# Altium PCB PCB_ModuLoop_V1.PcbDoc
Units mm, origin at the board's own origin, x right, y up, seen from the top; angles counter-clockwise.
Board outline 53.25 x 75 mm, 2 copper layers (Top Layer, Bottom Layer); 33 components, 28 nets, 92 pads, 45 vias.
Unrouted connection lines stored in the file: 1.
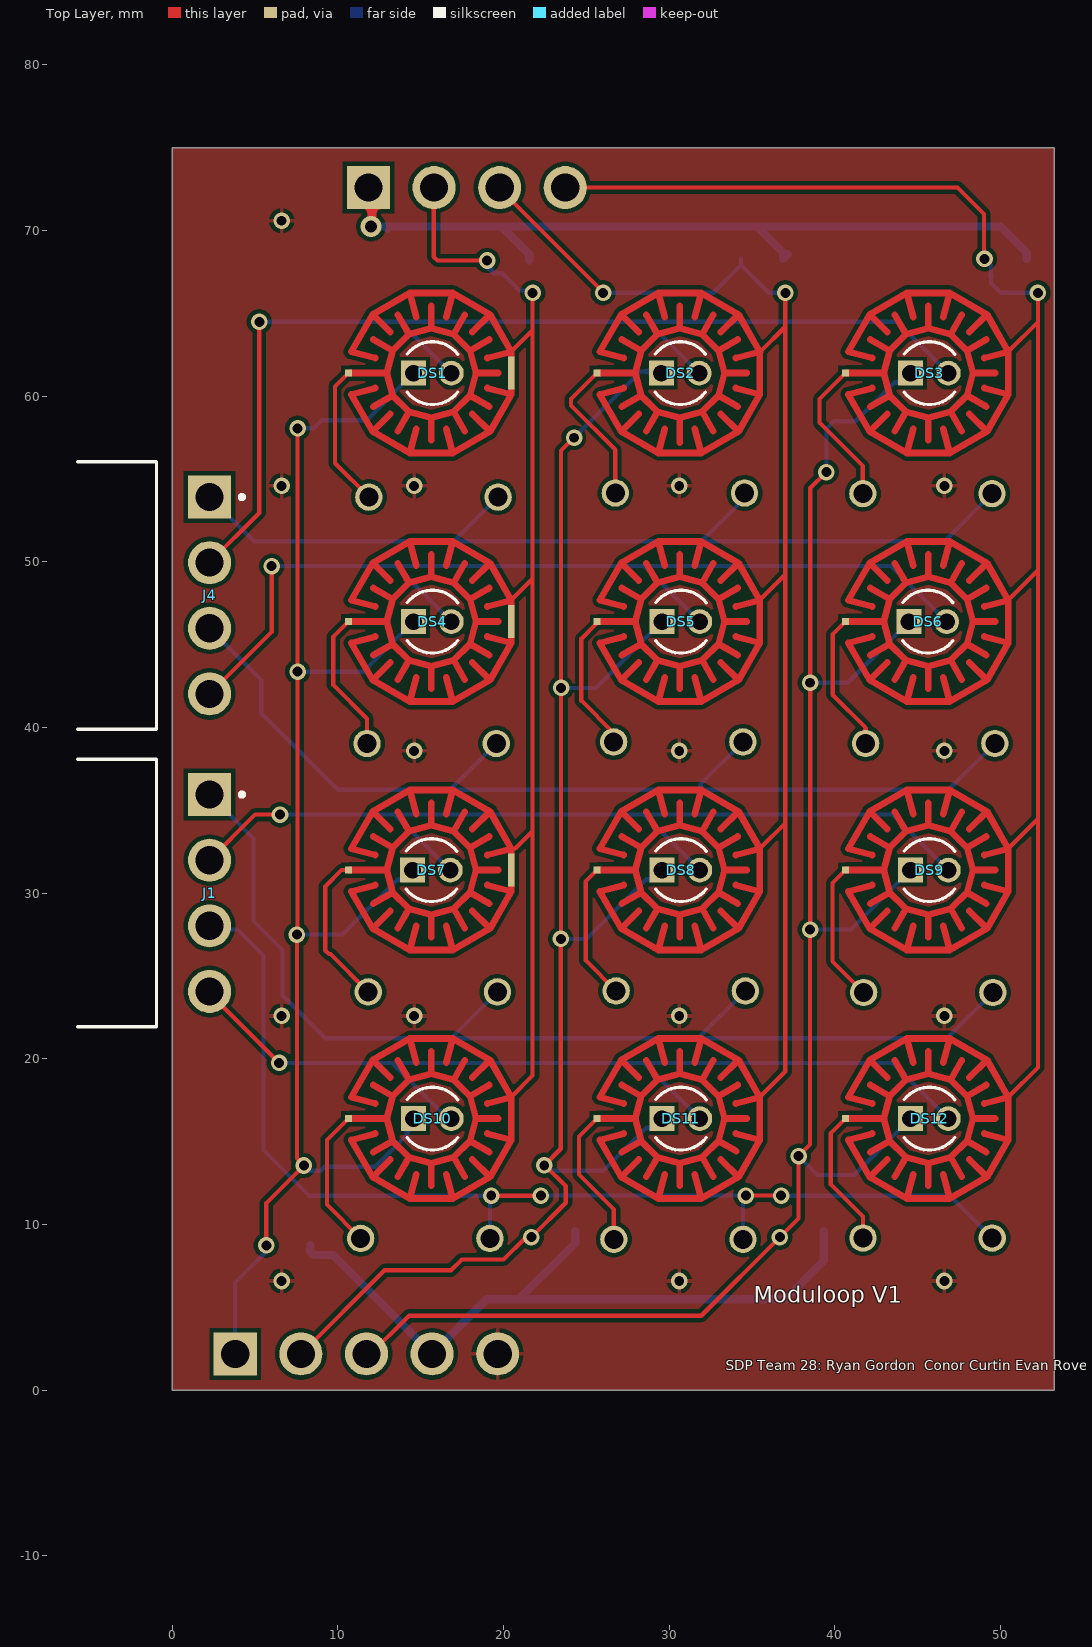
[diagram p0: Top Layer view]
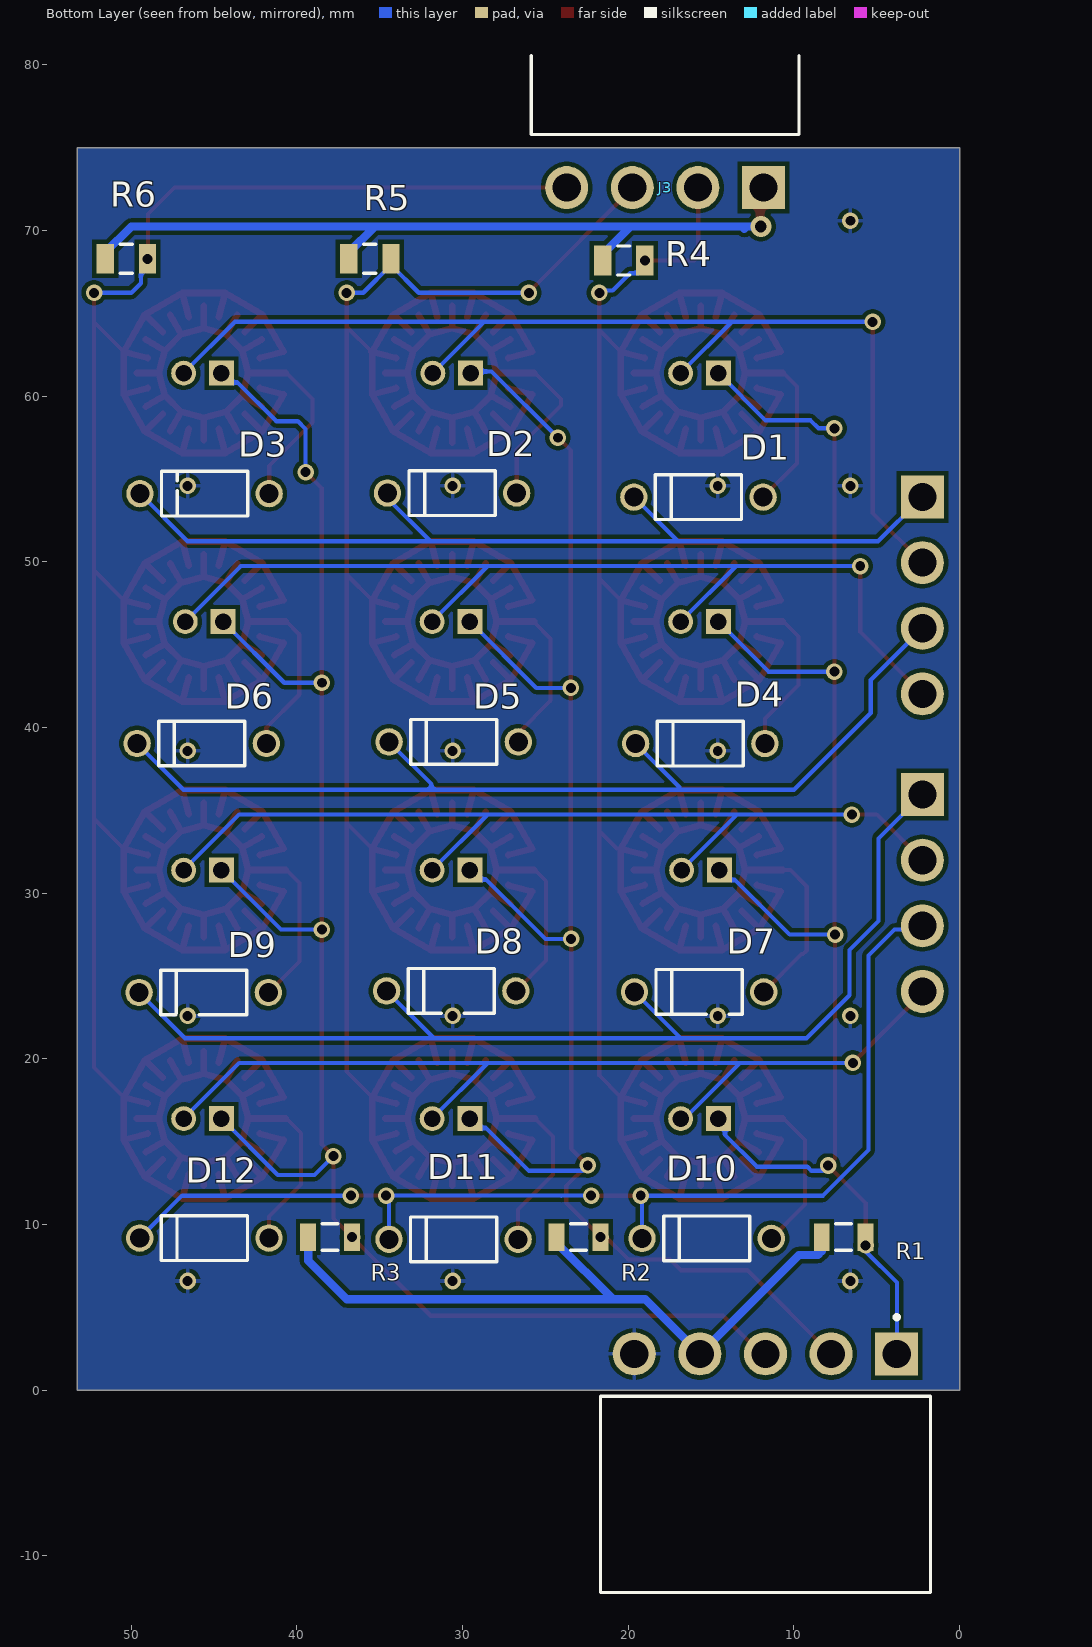
[diagram p1: Bottom Layer view, seen from below]

## Layer stack, top to bottom
Top Solder: solder mask 0.0102, Solder Resist, Dk 3.5
Top Layer: signal copper 0.0356
Dielectric 1: dielectric 0.32, FR-4, Dk 4.8
Bottom Layer: signal copper 0.0356
Bottom Solder: solder mask 0.0102, Solder Resist, Dk 3.5

## Board outline
0,0 53.25,0 53.25,75 0,75

## Design rules (kind name [scope] priority, off if disabled: settings)
Clearance [All] p1: gap=0.25 ignorepadtopadclearanceinfootprint=FALSE
ComponentClearance [All] p1 off: gap=0.254 collisioncheckmode=3 verticalgap=0.254 showdistances=FALSE
PolygonConnect [All] p1: connectstyle=Relief reliefconductorwidth=0.254 reliefentries=4 polygonreliefangle="90 Angle" airgapwidth=0.254
RoutingVias [All] p1: holewidth=0.6 width=1 viastyle="Through Hole" minholewidth=0.6 minwidth=1 maxholewidth=0.6 maxwidth=1
SolderMaskExpansion [All] p1: expansion=0.102 istentingtop=FALSE
Width Width_Power [(InNet('+3.3V') Or InNet('GND'))] p1: maxlimit=0.5 minlimit=0.25 preferedwidth=0.5
Width [All] p2 off: maxlimit=0.25 minlimit=0.2 preferedwidth=0.25
29 further rules are at their usual default settings.

## Classes and differential pairs
component class PCB: D1 D2 D8 D10 D11 D12 DS1 DS3 DS8 DS11 DS12 J1 J3 R3 R4 R6

## Components (designator, comment, footprint, x,y, rotation, side; value= is the part's Value field where it differs from the comment)
D1 "1N4004" FAIR-DO-41-2 15.765,53.915 r0 bottom
D2 "1N4004" FAIR-DO-41-2 30.64,54.16 r0 bottom
D3 "1N4004" FAIR-DO-41-2 45.58,54.125 r0 bottom
D4 "1N4004" FAIR-DO-41-2 15.655,39.04 r0 bottom
D5 "1N4004" FAIR-DO-41-2 30.54,39.14 r0 bottom
D6 "1N4004" FAIR-DO-41-2 45.75,39.045 r0 bottom
D7 "1N4004" FAIR-DO-41-2 15.725,24.05 r0 bottom
D8 "1N4004" FAIR-DO-41-2 30.69,24.11 r0 bottom
D9 "1N4004" FAIR-DO-41-2 45.63,24.015 r0 bottom
D10 "1N4004" FAIR-DO-41-2 15.27,9.17 r0 bottom
D11 "1N4004" FAIR-DO-41-2 30.55,9.115 r0 bottom
D12 "1N4004" FAIR-DO-41-2 45.59,9.19 r0 bottom
DS1 "304090041" LED-2P-2.28-3MM_A 15.7,61.4 r0 top
DS2 "304090041" LED-2P-2.28-3MM_A 30.66,61.4 r0 top
DS3 "304090041" LED-2P-2.28-3MM_A 45.7,61.4 r0 top
DS4 "304090041" LED-2P-2.28-3MM_A 15.7,46.4 r0 top
DS5 "304090041" LED-2P-2.28-3MM_A 30.7,46.4 r0 top
DS6 "304090041" LED-2P-2.28-3MM_A 45.6,46.4 r0 top
DS7 "304090041" LED-2P-2.28-3MM_A 15.64,31.4 r0 top
DS8 "304090041" LED-2P-2.28-3MM_A 30.7,31.4 r0 top
DS9 "304090041" LED-2P-2.28-3MM_A 45.7,31.4 r0 top
DS10 "304090041" LED-2P-2.28-3MM_A 15.7,16.4 r0 top
DS11 "304090041" LED-2P-2.28-3MM_A 30.7,16.4 r0 top
DS12 "304090041" LED-2P-2.28-3MM_A 45.7,16.4 r0 top
J1 "647676-4" FP-647676-4-MFG -5.65,30.02 r90 top
J3 "647676-4" FP-647676-4-MFG 17.78,80.5 r180 bottom
J4 "647676-4" FP-647676-4-MFG -5.65,47.98 r90 top
R1 "CRCW12061K50FKEA" FP-CRCW1206-e3-IPC_C 7,9.25 r180 bottom
R2 "CRCW12061K50FKEA" FP-CRCW1206-e3-IPC_C 23,9.25 r180 bottom
R3 "CRCW12061K50FKEA" FP-CRCW1206-e3-IPC_C 38,9.25 r180 bottom
R4 "CRCW12063K16FKEA" FP-CRCW1206-e3-MFG 20.275,68.2 r180 bottom
R5 "CRCW12063K16FKEA" FP-CRCW1206-e3-MFG 35.6,68.3 r180 bottom
R6 "CRCW12063K16FKEA" FP-CRCW1206-e3-MFG 50.3,68.3 r180 bottom

## Footprints (in the part's own frame and the unit in brackets; to place one, negate y for a bottom-side part, rotate by r counter-clockwise, add the part's x,y. Pads: shape width x height; smd on the part's side, far side on the other; paste and mask are expansions set on the pad)
FAIR-DO-41-2 [mm] "THD, 2-Leads, Body 5.2x2.72mm, Pin Spacing 7.8mm"
  round 1.65 hole 1.15: 1(-3.9,0) 2(3.9,0)
  silkscreen extent -2.6,-1.35 2.6,1.35, body extent -4.29,-1.17 4.29,1.18, height 2.35
FP-647676-4-MFG [mm]
  rect 2.6x2.6 hole 1.7 paste-2539.97 mask+0: 1(5.94,-7.9)
  round 2.6 hole 1.7 paste-2539.97 mask+0: 2(1.98,-7.9) 3(-1.98,-7.9) 4(-5.94,-7.9)
  silkscreen extent -8.08,-9.98 8.08,0.08, body extent -7.92,-8.46 7.92,7.11, height 8.8
FP-CRCW1206-e3-IPC_C [mm]
  rect 0.956x1.658 smd paste+0 mask+0: 1(-1.326,0) 2(1.326,0)
  silkscreen extent -0.47,-0.8 0.47,0.8, body extent -1.6,-0.8 1.6,0.8, height 0.6
FP-CRCW1206-e3-MFG [mm]
  rect 1.05x1.8 smd paste+0 mask+0: 1(-1.275,0) 2(1.275,0)
  silkscreen extent -0.38,-0.87 0.38,0.87, body extent -1.6,-0.8 1.6,0.8, height 0.6
LED-2P-2.28-3MM_A [mm] "LED, 2-Leads, Dia 3mm, Pitch 2.28mm"
  rect 1.5x1.5 hole 1: 1(-1.14,0)
  round 1.5 hole 1: 2(1.14,0)
  silkscreen extent -1.51,-1.9 1.52,1.9, body extent -1.9,-1.91 1.52,1.91, height 5.3

## Part data
D1 D2 D3 D4 D5 D6 D7 D8 D9 D10 D11 D12: library part CMP-004-00004-2, "General Purpose Rectifier, 400 V, 1 A, -55 to 175 degC, 2-Pin DO-204AL (DO-41), RoHS, Tape and Reel", Case/Package=DO-41-2, Forward Current=1A, Forward Voltage=1.1V, Manufacturer="Fairchild Semiconductor", Max Operating Temperature=175°C, Max Surge Current=30A, Min Operating Temperature=-55°C, Package Description="2-Pin Axial Lead, Dia 2.375 mm, Body Length 4.63 mm", Package Quantity=5000, Package Version="Rev. 2, 09/2008", Peak Reverse Current=50A, Datasheet URL=https://www.fairchildsemi.com/datasheets/1N/1N4004.pdf, Datasheet Version="Rev. 1.1.0, 11/2014", Diameter=2.72mm, Manufacturer URL=https://www.fairchildsemi.com/, Mounting Technology=TH, Package Reference=DO-41-2, Package URL=http://www.fairchildsemi.com/dwg/DO/DO41A.pdf, Packaging=TapeandReel, Pins=2, RoHS Compliant=True
DS1 DS2 DS3 DS4 DS5 DS6 DS7 DS8 DS9 DS10 DS11 DS12: library part CMP-007-00007-2, "Red LED, 80 mW, 30 mA, -25 to 85 degC, 2-Pin THD", Manufacturer="Shenzhen CGX", Package Description="2-Pin Through Hole Device, Dia 3 mm, Pitch 2.28 mm", Case/Package=304090041, Datasheet URL=http://datasheet.octopart.com/304090041-Chengguangxing-datasheet-62330656.pdf, Datasheet Version=Sep-14, Manufacturer URL=http://szcgx.com/, Mounting Technology=TH, Package Reference=304090041, RoHS Compliant=Unknown
J1 J3 J4: library part CMP-03369-000065-1, "CONN HEADER R/A 4POS 3.96MM", Current Rating=7.5A, Manufacturer=TE, Temperature="-25°C to +105°C", Temperature Range High=+105°C, Temperature Range Low=-25°C, Voltage Rating=250V, Automotive=No, Category=Conn, ComponentLink2Description=Datasheet, ComponentLink2URL=https://www.te.com/commerce/DocumentDelivery/DDEController?Action=showdoc&DocId=Specification+Or+Standard%7F108-2297%7FB%7Fpdf%7FEnglish%7FENG_SS_108-2297_B_108-2297RevB.pdf%7F647676-6, Conn Gender=Male, Conn Orientation="Right Angle", Contact Material=Tin, Device Class L1=Connectors, Device Class L2="Headers and Wire Housings", Device Class L3=unset, Digikey Description="CONN HEADER R/A 4POS 3.96MM", Footprint Url=https://www.te.com/commerce/DocumentDelivery/DDEController?Action=showdoc&DocId=Customer+Drawing%7F647676%7FB1%7Fpdf%7FEnglish%7FENG_CD_647676_B1.pdf%7F647676-6, Height=8.8mm, Lead Free=Yes, Manufacturer Part Number=647676-4, Mouser Description="4 Position Single Row 3.96 mm Right Angle Header Unshrouded Male Pin Connector", Number Of Contacts=4, Number Of Rows=1, Octopart=https://octopart.com/647676-4-te+connectivity-41901901, Package=647676-4, Pitch=3.96mm, RoHS=TRUE
R1 R2 R3: library part CMP-02407-002229-1, "RES Thick Film, 1.5kΩ, 1%, 0.25W, 100ppm/°C, 1206", Case Code (Imperial)=1206, Case Code (Metric)=3216, Max Operating Temperature=155°C, Max Power Dissipation=250mW, Min Operating Temperature=-55°C, Package Quantity=10, Resistance=1.5kR, Temperature Coefficient=100ppm/°C, Tolerance=1%, Voltage Rating=200V, Case/Package=1206, Composition="Thick Film", Contact Plating=Tin, Depth=1.6mm, Features="Automotive AEC-Q200", Height=0.024inch, Lead Free="Lead Free", Length=3.2mm, Military Standard=Not, Number of Terminations=2, Packaging="Tape and Reel", Power Rating=250mW, Radiation Hardening=No, Termination=SMD/SMT, Voltage Rating (DC)=200V, Weight=0.000353oz, Width=0.063inch
R4 R5 R6: library part CMP-2003-02148-2, "RES Thick Film, 3.16kΩ, 1%, 0.25W, 100ppm/°C, 1206", Case Code (Imperial)=1206, Case Code (Metric)=3216, Max Operating Temperature=155°C, Max Power Dissipation=250mW, Min Operating Temperature=-55°C, Package Quantity=10, Resistance=3.16kR, Temperature Coefficient=100ppm/°C, Tolerance=1%, Voltage Rating=200V, Case/Package=1206, Composition="Thick Film", Contact Plating=Tin, Depth=1.6mm, Features="Automotive AEC-Q200", Height=0.55mm, Lead Free="Lead Free", Length=3.2mm, Military Standard=Not, Mount="Surface Mount", Number of Pins=2, Number of Terminations=2, Packaging="Tape and Reel", Power Rating=250mW, Radiation Hardening=No, Termination=SMD/SMT, Voltage Rating (DC)=200V, Weight=0.000353oz, Width=1.6mm, Working Voltage=200V

## Free pads (board coordinates)
  rect 2.6x2.6 hole 1.7 paste-2539.97 mask+0: 1(3.8,2.2)
  round 2.6 hole 1.7 paste-2539.97 mask+0: 2(7.76,2.2) 3(11.72,2.2) 4(15.68,2.2) 5(19.64,2.2)
  rect 0.4x0.4 smd: A2(40.633,61.406) A3(25.632,61.406) A4(10.632,61.406) A6(40.633,46.406) A7(25.632,46.406) A8(10.632,46.406) A10(40.633,31.405) A11(25.632,31.405) A12(10.632,31.405) A14(40.633,16.405) A15(25.632,16.405) A16(10.632,16.405)
  rect 0.4x2 smd: B4(20.462,61.416) B8(20.462,46.416) B12(20.462,31.416)

## Via types
v1: diameter 1, hole 0.6, Top Layer to Bottom Layer, 44 vias
v2: diameter 1.27/1.27 (per signal layer), hole 0.711, Top Layer to Bottom Layer, 1 vias

## Nets (pads, with @x,y where several pads share a name; then routed paths per layer and width w, separated by ;. In a path a pad name is that pad's centre, name@x,y a point inside that pad or via, vN(x,y) a via of type N, cw(c..) or ccw(c..) an arc to the next point about the centre after c; other vN are vias at no path point)
+3.3V: J3.1 pad.4 R1.1 R2.1 R3.1 R4.1 R5.1 R6.1 | length 92.5
  Top Layer w0.5: J3.1 12.048,72.392 12.048,70.298 v2(12,70.25)
  Bottom Layer w0.5: R1.1@8.326,8.75 8.326,8.399 8.554,8.171 9.709,8.171 pad.4 18.98,5.5 20.927,5.5 ; v2(12,70.25) 13,70.25 ; 13,70.103 13,70.25 ; R4.1 21.55,68.575 19.875,70.25 ; R2.1@24.326,9.601 R2.1 24.326,8.899 20.927,5.5 ; R5.1@37.15,68.575 R5.1 36.875,68.675 35.3,70.25 ; R3.1@39.326,9.601 R3.1 39.326,7.826 37,5.5 20.927,5.5 ; R6.1 51.575,68.675 50,70.25 35.3,70.25 ; 13,70.25 19.875,70.25 ; 19.875,70.25 35.3,70.25
Col1_B: J3.2 R4.2 | length 60.4
  Top Layer w0.254: J3.2 15.775,72.575 15.775,68.427 16.002,68.2 v1(19,68.2) ; 20.462,17.712 21.75,19 v1(21.75,66.25)
  Bottom Layer w0.254: v1(19,68.2) 19,67.825 19.398,67.427 19.906,67.427 20.94,66.393 21.607,66.393 v1(21.75,66.25)
Col1_LED: DS1.1 DS4.1 DS7.1 DS10.1 pad.1 R1.2 | length 91.4
  Top Layer w0.254: v1(5.674,8.75) 5.674,11.304 v1(7.94,13.57) 7.52,13.99 v1(7.52,27.51) 7.56,27.55 v1(7.56,43.38) v1(7.56,58.07)
  Bottom Layer w0.254: pad.1 3.79,2.21 3.79,6.515 5.674,8.399 v1(5.674,8.75) ; v1(7.52,27.51) 10.26,27.51 13.56,30.81 13.91,30.81 DS7.1 ; v1(7.56,43.38) 11.54,43.38 DS4.1 ; v1(7.56,58.07) 8.522,58.07 9.003,58.551 11.711,58.551 DS1.1 ; v1(7.94,13.57) 8.26,13.25 8.952,13.25 9.202,13.5 12.25,13.5 14.168,15.418 14.168,16.008 DS10.1
Col2_B: J3.3 R5.2 | length 70.9
  Top Layer w0.254: J3.3 19.76,72.545 26,66.305 v1(26,66.25) ; 35.462,17.7 37,19.237 v1(37,66.25)
  Bottom Layer w0.254: v1(26,66.25) 32.65,66.25 R5.2@34.325,67.925 ; R5.2 R5.2@34.325,67.925 ; v1(37,66.25) 36,66.25 R5.2@34.325,67.925
Col2_LED: DS2.1 DS5.1 DS8.1 DS11.1 pad.2 R2.2 | length 98.5
  Top Layer w0.254: pad.2@7.75,2 pad.2@7.843,2.093 ; pad.2 12.81,7.25 16.827,7.25 17.475,7.898 19.998,7.898 21.273,9.173 21.597,9.173 v1(21.674,9.25) 23.75,11.326 23.75,12.326 22.496,13.58 v1(22.45,13.58) 23.45,14.58 v1(23.45,27.25) 23.47,27.27 v1(23.47,42.4) 23.47,56.72 v1(24.25,57.5)
  Bottom Layer w0.254: v1(22.45,13.58) 22.78,13.25 26,13.25 28.59,15.84 29,15.84 DS11.1 ; v1(23.45,27.25) 25,27.25 28.59,30.84 29,30.84 DS8.1 ; v1(23.47,42.4) 25.56,42.4 DS5.1 ; v1(24.25,57.5) 28.25,61.5 29.42,61.5 DS2.1
Col3_B: J3.4 R6.2 | length 82.6
  Top Layer w0.254: J3.4 47.4,72.6 49,71 49,68.325 v1(49.025,68.3) ; 50.462,17.7 52.25,19.488 v1(52.25,66.25)
  Bottom Layer w0.254: v1(49.025,68.3) 49.423,67.902 49.423,66.827 50,66.25 v1(52.25,66.25)
Col3_LED: DS3.1 DS6.1 DS9.1 DS12.1 pad.3 R3.2 | length 107.9
  Top Layer w0.254: pad.3@11.85,2.07 14.28,4.5 31.924,4.5 v1(36.674,9.25) 37.8,10.376 v1(37.8,14.14) 38.5,14.84 v1(38.5,27.81) 38.51,27.82 38.51,54.46 v1(39.48,55.43)
  Bottom Layer w0.254: v1(37.8,14.14) 38.94,13 41.16,13 DS12.1 ; v1(38.5,27.81) 40.97,27.81 DS9.1 ; v1(38.5,42.71) 40.77,42.71 DS6.1 ; v1(39.48,55.43) 39.48,58.028 39.952,58.5 41.25,58.5 43.59,60.84 44,60.84 DS3.1
GND: pad.5 | length 0.4
  Top Layer w0.5: pad.5@19.61,1.91 pad.5@19.615,1.905
  Bottom Layer w0.5: pad.5@19.75,2.05 19.61,1.91 pad.5@19.77,1.75
  other v1: 6.6,6.6 30.6,6.6 46.6,6.6 6.6,22.6 14.6,22.6 30.6,22.6 46.6,22.6 14.6,38.6 30.6,38.6 46.6,38.6 6.6,54.6 14.6,54.6 30.6,54.6 46.6,54.6 6.6,70.6
NetD1_1: D1.1 | length 8.7
  Top Layer w0.254: 10.632,61.406 9.82,60.593 9.82,55.96 D1.1
NetD2_1: D2.1 | length 9
  Top Layer w0.254: 25.632,61.406 24.07,59.843 24.07,59.45 26.74,56.78 D2.1
NetD3_1: D3.1 | length 9
  Top Layer w0.254: 40.633,61.406 39.06,59.833 39.06,58.41 41.68,55.79 D3.1
NetD4_1: D4.1 | length 8.6
  Top Layer w0.254: 10.632,46.406 9.72,45.493 9.72,42.57 11.755,40.535 D4.1
NetD5_1: D5.1 | length 8.5
  Top Layer w0.254: 25.632,46.406 25.632,46.312 24.69,45.37 24.69,41.63 26.64,39.68 D5.1
NetD6_1: D6.1 | length 8.5
  Top Layer w0.254: 40.633,46.406 39.86,45.633 39.86,41.99 41.85,40 D6.1
NetD7_1: D7.1 | length 9.3
  Top Layer w0.254: 10.632,31.405 10.215,31.405 9.23,30.42 9.23,26.56 9.46,26.33 9.545,26.33 D7.1
NetD8_1: D8.1 | length 8.3
  Top Layer w0.254: 25.632,31.405 24.96,30.733 24.96,25.94 D8.1
NetD9_1: D9.1 | length 8.5
  Top Layer w0.254: 40.633,31.405 39.85,30.623 39.85,25.895 D9.1
NetD10_1: D10.1 | length 8.6
  Top Layer w0.254: 10.632,16.405 9.33,15.103 9.33,11.21 D10.1
NetD11_1: D11.1 | length 8.6
  Top Layer w0.254: 25.632,16.405 24.55,15.323 24.55,13.02 26.65,10.92 D11.1
NetD12_1: D12.1 | length 8.4
  Top Layer w0.254: 40.633,16.405 39.75,15.523 39.75,12.43 41.69,10.49 D12.1
Row1_B: D1.2 D2.2 D3.2 J4.1 | length 57.8
  Bottom Layer w0.254: J4.1 2.17,53.92 2,53.75 2.42,53.75 4.92,51.25 17,51.25 ; D1.2 17,51.25 ; D2.2 34.54,53.84 31.95,51.25 ; D3.2 46.605,51.25 31.95,51.25 ; 17,51.25 31.95,51.25
Row1_LED: DS1.2 DS2.2 DS3.2 J4.2 | length 67.4
  Top Layer w0.254: J4.2 5.25,52.96 v1(5.25,64.5)
  Bottom Layer w0.254: v1(5.25,64.5) 13.75,64.5 ; DS1.2 16.84,61.41 13.75,64.5 ; DS2.2 28.75,64.45 28.75,64.5 ; DS3.2 43.74,64.5 28.75,64.5 ; 13.75,64.5 28.75,64.5
Row2_B: D4.2 D5.2 D6.2 J4.3 | length 61.6
  Bottom Layer w0.254: J4.3 5.367,42.883 5.367,40.883 10,36.25 16.925,36.25 ; D4.2 16.925,36.41 16.925,36.25 ; D5.2 31.89,36.59 31.89,36.25 ; D6.2 46.855,36.25 31.89,36.25 ; 16.925,36.25 31.89,36.25
Row2_LED: DS4.2 DS5.2 DS6.2 J4.4 | length 60.9
  Top Layer w0.254: J4.4 5.98,45.77 6,45.77 v1(6,49.75)
  Bottom Layer w0.254: v1(6,49.75) 13.5,49.75 ; DS4.2 13.5,49.74 13.5,49.75 ; DS5.2 28.5,49.74 28.5,49.75 ; DS6.2 43.39,49.75 28.5,49.75 ; 13.5,49.75 28.5,49.75
Row3_B: D7.2 D8.2 D9.2 J1.1 | length 67
  Bottom Layer w0.254: J1.1 4.9,33.31 4.9,28.33 6.32,26.91 6.65,26.58 6.65,23.85 9.25,21.25 16.94,21.25 ; D7.2 16.94,21.365 16.94,21.25 ; D8.2 31.79,21.31 31.79,21.25 ; D9.2 46.765,21.25 31.79,21.25 ; 16.94,21.25 31.79,21.25
Row3_LED: DS7.2 DS8.2 DS9.2 J1.2 | length 56.6
  Top Layer w0.254: J1.2 5,34.75 v1(6.5,34.75)
  Bottom Layer w0.254: v1(6.5,34.75) 13.43,34.75 ; DS7.2 13.43,34.75 ; DS8.2 28.5,34.74 28.5,34.75 ; DS9.2 43.49,34.75 28.5,34.75 ; 13.43,34.75 28.5,34.75
Row4_B: D10.2 D11.2 D12.2 J1.3 | length 67.3
  Top Layer w0.254: v1(19.25,11.75) v1(22.25,11.75) ; v1(34.623,11.756) 34.626,11.753 36.747,11.753 v1(36.75,11.75)
  Bottom Layer w0.254: J1.3 2.471,27.819 3.931,27.819 5.5,26.25 5.5,14.5 8.25,11.75 v1(19.25,11.75) 19.17,11.67 D10.2 ; v1@22.256,11.756 24.054,11.756 ; 24.054,11.741 24.054,11.756 ; D11.2 34.45,11.583 v1(34.623,11.756) 24.054,11.756 ; v1(36.75,11.75) 46.93,11.75 D12.2
Row4_LED: DS10.2 DS11.2 DS12.2 J1.4 | length 57.7
  Top Layer w0.254: J1.4 2.468,24.08 2.468,23.752 v1(6.45,19.77)
  Bottom Layer w0.254: v1(6.45,19.77) 6.47,19.75 13.25,19.75 ; DS10.2 16.6,16.4 13.25,19.75 ; DS11.2 28.5,19.74 28.5,19.75 ; DS12.2 43.49,19.75 28.5,19.75 ; 13.25,19.75 28.5,19.75
copper on no net: | length 984.8
  Top Layer w0.254: 20.462,32.7 20.7,32.7 21.75,33.75 ; 20.462,47.7 21.75,48.987 21.75,49 ; 20.462,62.7 21.75,63.988 21.75,64 ; 35.462,32.7 37.011,34.249 ; 35.462,47.7 36.963,49.2 ; 35.5,62.7 37,64.2 ; 50.462,32.7 50.462,32.712 52.25,34.5 ; 50.462,47.7 50.462,47.712 52.25,49.5 ; 50.462,62.7 52.25,64.488 52.25,64.5
  Top Layer w0.4: 10.682,16.405 12.932,16.405 ; 10.682,31.405 12.932,31.405 ; 10.682,46.406 12.932,46.406 ; 10.682,61.406 12.932,61.406 ; 12.125,14.381 13.294,15.055 ; 12.125,18.431 13.294,17.755 ; 12.125,29.381 13.294,30.055 ; 12.125,33.431 13.294,32.755 ; 12.125,44.381 13.294,45.056 ; 12.125,48.431 13.294,47.756 ; 12.125,59.38 13.294,60.056 ; 12.125,63.431 13.294,62.756 ; 12.252,15.5 10.803,15.111 12.097,12.87 ; 12.252,17.311 10.803,17.7 12.097,19.941 ; 12.252,30.5 10.803,30.112 12.097,27.87 ; 12.252,32.311 10.803,32.7 12.097,34.941 ; 12.252,45.5 10.803,45.112 12.097,42.87 ; 12.252,47.311 10.803,47.7 12.097,49.941 ; 12.252,60.5 10.803,60.112 12.097,57.87 ; 12.252,62.311 10.803,62.7 12.097,64.941 ; 13.158,13.931 12.097,12.87 ; 13.158,18.88 12.097,19.941 ; 13.158,28.931 12.097,27.87 ; 13.158,33.88 12.097,34.941 ; 13.158,43.931 12.097,42.87 ; 13.158,48.88 12.097,49.941 ; 13.158,58.931 12.097,57.87 ; 13.158,63.88 12.097,64.941 ; 13.607,12.898 14.282,14.067 ; 13.607,19.913 14.282,18.744 ; 13.607,27.898 14.282,29.067 ; 13.607,34.913 14.282,33.744 ; 13.607,42.898 14.282,44.067 ; 13.607,49.913 14.282,48.744 ; 13.607,57.898 14.282,59.067 ; 13.607,64.913 14.282,63.744 ; 14.727,13.025 14.338,11.576 ; 14.727,19.786 14.338,21.235 ; 14.727,28.025 14.338,26.576 ; 14.727,34.786 14.338,36.235 ; 14.727,43.025 14.338,41.576 ; 14.727,49.786 14.338,51.235 ; 14.727,58.025 14.338,56.576 ; 14.727,64.786 14.338,66.235 ; 15.632,12.355 15.632,13.705 ; 15.632,20.455 15.632,19.105 ; 15.632,27.356 15.632,28.706 ; 15.632,35.455 15.632,34.105 ; 15.632,42.356 15.632,43.706 ; 15.632,50.455 15.632,49.105 ; 15.632,57.356 15.632,58.706 ; 15.632,65.456 15.632,64.106 ; 16.538,13.025 16.926,11.576 ; 16.538,19.786 16.926,21.235 ; 16.538,28.025 16.926,26.576 ; 16.538,34.786 16.926,36.235 ; 16.538,43.025 16.926,41.576 ; 16.538,49.786 16.926,51.235 ; 16.538,58.025 16.926,56.576 ; 16.538,64.786 16.926,66.235 ; 17.657,12.898 16.982,14.067 ; 17.657,19.913 16.982,18.744 ; 17.657,27.898 16.982,29.067 ; 17.657,34.913 16.982,33.744 ; 17.657,42.898 16.982,44.067 ; 17.657,49.913 16.982,48.744 ; 17.657,57.898 16.982,59.067 ; 17.657,64.913 16.982,63.744 ; 18.107,13.931 19.168,12.87 ; 18.107,18.88 19.168,19.941 ; 18.107,28.931 19.168,27.87 ; 18.107,33.88 19.168,34.941 ; 18.107,43.931 19.168,42.87 ; 18.107,48.88 19.168,49.941 ; 18.107,58.931 19.168,57.87 ; 18.107,63.88 19.168,64.941 ; 19.013,15.5 20.462,15.111 ; 19.013,17.311 20.462,17.7 ; 19.013,30.5 20.462,30.112 ; 19.013,32.311 20.462,32.7 ; 19.013,45.5 20.462,45.112 ; 19.013,47.311 20.462,47.7 ; 19.013,60.5 20.462,60.112 ; 19.013,62.311 20.462,62.7 ; 19.14,14.381 17.971,15.055 ; 19.14,18.431 17.971,17.755 ; 19.14,29.381 17.971,30.055 ; 19.14,33.431 17.971,32.755 ; 19.14,44.381 17.971,45.056 ; 19.14,48.431 17.971,47.756 ; 19.14,59.38 17.971,60.056 ; 19.14,63.431 17.971,62.756 ; 19.682,16.405 18.332,16.405 ; 19.682,31.405 18.332,31.405 ; 19.682,46.406 18.332,46.406 ; 19.682,61.406 18.332,61.406 ; 25.632,16.405 27.933,16.405 ; 25.682,31.405 27.933,31.405 ; 25.682,46.406 27.933,46.406 ; 25.682,61.406 27.933,61.406 ; 27.125,14.381 28.294,15.055 ; 27.125,29.381 28.294,30.055 ; 27.125,33.431 28.294,32.755 ; 27.125,44.381 28.294,45.056 ; 27.125,48.431 28.294,47.756 ; 27.125,59.38 28.294,60.056 ; 27.125,63.431 28.294,62.756 ; 27.252,15.5 25.803,15.111 27.097,12.87 ; 27.252,17.311 25.803,17.7 27.097,19.941 ; 27.252,30.5 25.803,30.112 27.097,27.87 ; 27.252,32.311 25.803,32.7 27.097,34.941 ; 27.252,45.5 25.803,45.112 27.097,42.87 ; 27.252,47.311 25.803,47.7 27.097,49.941 ; 27.252,60.5 25.803,60.112 27.097,57.87 ; 27.252,62.311 25.803,62.7 27.097,64.941 ; 28.158,13.931 27.097,12.87 ; 28.158,18.88 27.097,19.941 ; 28.158,28.931 27.097,27.87 ; 28.158,33.88 27.097,34.941 ; 28.158,43.931 27.097,42.87 ; 28.158,48.88 27.097,49.941 ; 28.158,58.931 27.097,57.87 ; 28.158,63.88 27.097,64.941 ; 28.607,12.898 29.282,14.067 ; 28.607,19.913 29.282,18.744 ; 28.607,27.898 29.282,29.067 ; 28.607,34.913 29.282,33.744 ; 28.607,42.898 29.282,44.067 ; 28.607,49.913 29.282,48.744 ; 28.607,57.898 29.282,59.067 ; 28.607,64.913 29.282,63.744 ; 29.727,13.025 29.338,11.576 ; 29.727,19.786 29.338,21.235 ; 29.727,28.025 29.338,26.576 ; 29.727,34.786 29.338,36.235 ; 29.727,43.025 29.338,41.576 ; 29.727,49.786 29.338,51.235 ; 29.727,58.025 29.338,56.576 ; 29.727,64.786 29.338,66.235 ; 30.632,12.355 30.632,13.705 ; 30.632,20.455 30.632,19.105 ; 30.632,27.356 30.632,28.706 ; 30.632,35.455 30.632,34.105 ; 30.632,42.356 30.632,43.706 ; 30.632,50.455 30.632,49.105 ; 30.632,57.212 30.632,58.706 ; 30.632,65.456 30.632,64.106 ; 31.538,13.025 31.926,11.576 ; 31.538,19.786 31.926,21.235 ; 31.538,28.025 31.926,26.576 ; 31.538,34.786 31.926,36.235 ; 31.538,43.025 31.926,41.576 ; 31.538,49.786 31.926,51.235 ; 31.538,58.025 31.926,56.576 ; 31.538,64.786 31.926,66.235 ; 32.657,12.898 31.982,14.067 ; 32.657,19.913 31.982,18.744 ; 32.657,27.898 31.982,29.067 ; 32.657,34.913 31.982,33.744 ; 32.657,42.898 31.982,44.067 ; 32.657,49.913 31.982,48.744 ; 32.657,57.898 31.982,59.067 ; 32.657,64.913 31.982,63.744 ; 33.107,13.931 34.168,12.87 ; 33.107,18.88 34.168,19.941 ; 33.107,28.931 34.168,27.87 ; 33.107,33.88 34.168,34.941 ; 33.107,43.931 34.168,42.87 ; 33.107,48.88 34.168,49.941 ; 33.107,58.931 34.168,57.87 ; 33.107,63.88 34.168,64.941 ; 34.013,15.5 35.462,15.111 ; 34.013,17.311 35.462,17.7 ; 34.013,30.5 35.462,30.112 ; 34.013,32.312 35.462,32.7 ; 34.013,45.5 35.462,45.112 ; 34.013,47.311 35.462,47.7 ; 34.013,60.5 35.462,60.112 ; 34.013,62.311 35.462,62.7 ; 34.041,14.437 32.971,15.055 ; 34.14,18.431 32.971,17.755 ; 34.14,29.381 32.971,30.055 ; 34.14,33.431 32.971,32.755 ; 34.14,44.381 32.971,45.056 ; 34.14,48.431 32.971,47.756 ; 34.14,59.38 32.971,60.056 ; 34.14,63.431 32.971,62.756 ; 34.682,16.405 33.332,16.405 ; 34.682,31.405 33.332,31.405 ; 34.682,46.406 33.332,46.406 ; 34.682,61.406 33.332,61.406 ; 35.349,32.897 34.168,34.941 ; 35.462,32.699 35.462,31.416 35.462,30.112 ; 35.5,62.7 35.462,62.7 ; 40.682,16.405 42.932,16.405 ; 40.682,31.405 42.932,31.405 ; 40.682,46.406 42.932,46.406 ; 40.682,61.406 42.932,61.406 ; 42.125,14.381 43.294,15.055 ; 42.125,18.431 43.294,17.755 ; 42.125,29.381 43.294,30.055 ; 42.125,33.431 43.294,32.755 ; 42.125,44.381 43.294,45.056 ; 42.125,48.431 43.294,47.756 ; 42.125,59.38 43.294,60.056 ; 42.125,63.431 43.294,62.756 ; 42.252,15.5 40.803,15.111 42.097,12.87 ; 42.252,17.311 40.803,17.7 42.097,19.941 ; 42.252,30.5 40.803,30.112 42.097,27.87 ; 42.252,32.311 40.803,32.7 42.097,34.941 ; 42.252,45.5 40.803,45.112 42.097,42.87 ; 42.252,47.311 40.803,47.7 42.097,49.941 ; 42.252,60.5 40.803,60.112 42.097,57.87 ; 42.252,62.311 40.803,62.7 42.097,64.941 ; 43.158,13.931 42.097,12.87 ; 43.158,18.88 42.097,19.941 ; 43.158,28.931 42.097,27.87 ; 43.158,33.88 42.097,34.941 ; 43.158,43.931 42.097,42.87 ; 43.158,48.88 42.097,49.941 ; 43.158,58.931 42.097,57.87 ; 43.158,63.88 42.097,64.941 ; 43.607,12.898 44.283,14.067 ; 43.607,19.913 44.283,18.744 ; 43.607,27.898 44.283,29.067 ; 43.607,34.913 44.283,33.744 ; 43.607,42.898 44.283,44.067 ; 43.607,49.913 44.283,48.744 ; 43.607,57.898 44.283,59.067 ; 43.607,64.913 44.283,63.744 ; 44.726,13.025 44.338,11.576 ; 44.726,19.786 44.338,21.235 ; 44.726,28.025 44.338,26.576 ; 44.726,34.786 44.338,36.235 ; 44.726,43.025 44.338,41.576 ; 44.726,49.786 44.338,51.235 ; 44.726,58.025 44.338,56.576 ; 44.726,64.786 44.338,66.235 ; 45.633,12.355 45.633,13.705 ; 45.633,20.455 45.633,19.105 ; 45.633,27.356 45.633,28.706 ; 45.633,35.455 45.633,34.105 ; 45.633,42.356 45.633,43.706 ; 45.633,50.455 45.633,49.105 ; 45.633,57.356 45.633,58.706 ; 45.633,65.456 45.633,64.106 ; 46.538,13.025 46.926,11.576 ; 46.538,19.786 46.926,21.235 ; 46.538,28.025 46.926,26.576 ; 46.538,34.786 46.926,36.235 ; 46.538,43.025 46.926,41.576 ; 46.538,49.786 46.926,51.235 ; 46.538,58.025 46.926,56.576 ; 46.538,64.786 46.926,66.235 ; 47.657,12.898 46.983,14.067 ; 47.657,19.913 46.983,18.744 ; 47.657,27.898 46.983,29.067 ; 47.657,34.913 46.983,33.744 ; 47.657,42.898 46.983,44.067 ; 47.657,49.913 46.983,48.744 ; 47.657,57.898 46.983,59.067 ; 47.657,64.913 46.983,63.744 ; 48.107,13.931 49.168,12.87 ; 48.107,18.88 49.168,19.941 ; 48.107,28.931 49.168,27.87 ; 48.107,33.88 49.168,34.941 ; 48.107,43.931 49.168,42.87 ; 48.107,48.88 49.168,49.941 ; 48.107,58.931 49.168,57.87 ; 48.107,63.88 49.168,64.941 ; 49.013,15.5 50.462,15.111 ; 49.013,17.311 50.462,17.7 ; 49.013,30.5 50.462,30.112 ; 49.013,32.311 50.462,32.7 ; 49.013,45.5 50.462,45.112 ; 49.013,47.311 50.462,47.7 ; 49.013,60.5 50.462,60.112 ; 49.013,62.311 50.462,62.7 ; 49.14,14.381 47.971,15.055 ; 49.14,18.431 47.971,17.755 ; 49.14,29.381 47.971,30.055 ; 49.14,33.431 47.971,32.755 ; 49.14,44.381 47.971,45.056 ; 49.14,48.431 47.971,47.756 ; 49.14,59.38 47.971,60.056 ; 49.14,63.431 47.971,62.756 ; 49.682,16.405 48.332,16.405 ; 49.682,31.405 48.332,31.405 ; 49.682,46.406 48.332,46.406 ; 49.682,61.406 48.332,61.406 ; 12.097,12.87 14.338,11.576 ; 12.097,19.941 14.338,21.235 ; 12.097,27.87 14.338,26.576 ; 12.097,34.941 14.338,36.235 ; 12.097,42.87 14.338,41.576 ; 12.097,49.941 14.338,51.235 ; 12.097,57.87 14.338,56.576 ; 12.097,64.941 14.338,66.235 ; 12.932,16.405 13.294,17.755 ; 12.932,16.405 13.294,15.055 ; 12.932,31.405 13.294,30.055 ; 12.932,31.405 13.294,32.755 ; 12.932,46.406 13.294,45.056 ; 12.932,46.406 13.294,47.756 ; 12.932,61.406 13.294,62.756 ; 12.932,61.406 13.294,60.056 ; 13.294,15.055 14.282,14.067 ; 13.294,17.755 14.282,18.744 ; 13.294,30.055 14.282,29.067 ; 13.294,32.755 14.282,33.744 ; 13.294,45.056 14.282,44.067 ; 13.294,47.756 14.282,48.744 ; 13.294,60.056 14.282,59.067 ; 13.294,62.756 14.282,63.744 ; 14.282,14.067 15.632,13.705 ; 14.282,18.744 15.632,19.105 ; 14.282,29.067 15.632,28.706 ; 14.282,33.744 15.632,34.105 ; 14.282,44.067 15.632,43.706 ; 14.282,48.744 15.632,49.105 ; 14.282,59.067 15.632,58.706 ; 14.282,63.744 15.632,64.106 ; 14.338,11.576 16.926,11.576 ; 14.338,21.235 16.926,21.235 ; 14.338,26.576 16.926,26.576 ; 14.338,36.235 16.926,36.235 ; 14.338,41.576 16.926,41.576 ; 14.338,51.235 16.926,51.235 ; 14.338,56.576 16.926,56.576 ; 14.338,66.235 16.926,66.235 ; 15.632,13.705 16.982,14.067 ; 15.632,19.105 16.982,18.744 ; 15.632,28.706 16.982,29.067 ; 15.632,34.105 16.982,33.744 ; 15.632,43.706 16.982,44.067 ; 15.632,49.105 16.982,48.744 ; 15.632,58.706 16.982,59.067 ; 15.632,64.106 16.982,63.744 ; 16.926,11.576 19.168,12.87 ; 16.926,21.235 19.168,19.941 ; 16.926,26.576 19.168,27.87 ; 16.926,36.235 19.168,34.941 ; 16.926,41.576 19.168,42.87 ; 16.926,51.235 19.168,49.941 ; 16.926,56.576 19.168,57.87 ; 16.926,66.235 19.168,64.941 ; 16.982,14.067 17.971,15.055 ; 16.982,18.744 17.971,17.755 ; 16.982,29.067 17.971,30.055 ; 16.982,33.744 17.971,32.755 ; 16.982,44.067 17.971,45.056 ; 16.982,48.744 17.971,47.756 ; 16.982,59.067 17.971,60.056 ; 16.982,63.744 17.971,62.756 ; 17.971,15.055 18.332,16.405 ; 17.971,17.755 18.332,16.405 ; 17.971,30.055 18.332,31.405 ; 17.971,32.755 18.332,31.405 ; 17.971,45.056 18.332,46.406 ; 17.971,47.756 18.332,46.406 ; 17.971,60.056 18.332,61.406 ; 17.971,62.756 18.332,61.406 ; 19.168,12.87 20.462,15.111 ; 19.168,19.941 20.462,17.7 ; 19.168,27.87 20.462,30.112 ; 19.168,34.941 20.462,32.7 ; 19.168,42.87 20.462,45.112 ; 19.168,49.941 20.462,47.7 ; 19.168,57.87 20.462,60.112 ; 19.168,64.941 20.462,62.7 ; 20.462,15.111 20.462,17.7 ; 20.462,30.112 20.462,32.7 ; 20.462,45.112 20.462,47.7 ; 20.462,60.112 20.462,62.7 ; 27.097,12.87 29.338,11.576 ; 27.097,19.941 29.338,21.235 ; 27.097,27.87 29.338,26.576 ; 27.097,34.941 29.338,36.235 ; 27.097,42.87 29.338,41.576 ; 27.097,49.941 29.338,51.235 ; 27.097,57.87 29.338,56.576 ; 27.097,64.941 29.338,66.235 ; 27.933,16.405 28.294,15.055 ; 27.933,16.405 28.294,17.755 ; 27.933,31.405 28.294,30.055 ; 27.933,31.405 28.294,32.755 ; 27.933,46.406 28.294,45.056 ; 27.933,46.406 28.294,47.756 ; 27.933,61.406 28.294,60.056 ; 27.933,61.406 28.294,62.756 ; 28.294,15.055 29.282,14.067 ; 28.294,17.755 27.125,18.431 28.294,17.755 ; 28.294,17.755 29.282,18.744 ; 28.294,30.055 29.282,29.067 ; 28.294,32.755 29.282,33.744 ; 28.294,45.056 29.282,44.067 ; 28.294,47.756 29.282,48.744 ; 28.294,60.056 29.282,59.067 ; 28.294,62.756 29.282,63.744 ; 29.282,14.067 30.632,13.705 ; 29.282,18.744 30.632,19.105 ; 29.282,29.067 30.632,28.706 ; 29.282,33.744 30.632,34.105 ; 29.282,44.067 30.632,43.706 ; 29.282,48.744 30.632,49.105 ; 29.282,59.067 30.632,58.706 ; 29.282,63.744 30.632,64.106 ; 29.338,11.576 31.926,11.576 ; 29.338,21.235 31.926,21.235 ; 29.338,26.576 31.926,26.576 ; 29.338,36.235 31.926,36.235 ; 29.338,41.576 31.926,41.576 ; 29.338,51.235 31.926,51.235 ; 29.338,56.576 31.926,56.576 ; 29.338,66.235 31.926,66.235 ; 30.632,13.705 31.982,14.067 ; 30.632,19.105 31.982,18.744 ; 30.632,28.706 31.982,29.067 ; 30.632,34.105 31.982,33.744 ; 30.632,43.706 31.982,44.067 ; 30.632,49.105 31.982,48.744 ; 30.632,58.706 31.982,59.067 ; 30.632,64.106 31.982,63.744 ; 31.926,11.576 34.168,12.87 ; 31.926,21.235 34.168,19.941 ; 31.926,26.576 34.168,27.87 ; 31.926,36.235 34.168,34.941 ; 31.926,41.576 34.168,42.87 ; 31.926,51.235 34.168,49.941 ; 31.926,56.576 34.168,57.87 ; 31.926,66.235 34.168,64.941 ; 31.982,14.067 32.971,15.055 ; 31.982,18.744 32.971,17.755 ; 31.982,29.067 32.971,30.055 ; 31.982,33.744 32.971,32.755 ; 31.982,44.067 32.971,45.056 ; 31.982,48.744 32.971,47.756 ; 31.982,59.067 32.971,60.056 ; 31.982,63.744 32.971,62.756 ; 32.971,15.055 33.332,16.405 ; 32.971,17.755 33.332,16.405 ; 32.971,30.055 33.332,31.405 ; 32.971,32.755 33.332,31.405 ; 32.971,45.056 33.332,46.406 ; 32.971,47.756 33.332,46.406 ; 32.971,60.056 33.332,61.406 ; 32.971,62.756 33.332,61.406 ; 34.168,12.87 35.462,15.111 ; 34.168,19.941 35.462,17.7 ; 34.168,27.87 35.462,30.112 ; 34.168,42.87 35.462,45.112 ; 34.168,49.941 35.462,47.7 ; 34.168,57.87 35.462,60.112 ; 34.168,64.941 35.462,62.7 ; 35.462,15.111 35.462,17.7 ; 35.462,45.112 35.462,47.7 ; 35.462,60.112 35.462,62.7 ; 42.097,12.87 44.338,11.576 ; 42.097,19.941 44.338,21.235 ; 42.097,27.87 44.338,26.576 ; 42.097,34.941 44.338,36.235 ; 42.097,42.87 44.338,41.576 ; 42.097,49.941 44.338,51.235 ; 42.097,57.87 44.338,56.576 ; 42.097,64.941 44.338,66.235 ; 42.932,16.405 43.294,15.055 ; 42.932,16.405 43.294,17.755 ; 42.932,31.405 43.294,30.055 ; 42.932,31.405 43.294,32.755 ; 42.932,46.406 43.294,45.056 ; 42.932,46.406 43.294,47.756 ; 42.932,61.406 43.294,60.056 ; 42.932,61.406 43.294,62.756 ; 43.294,15.055 44.283,14.067 ; 43.294,17.755 44.283,18.744 ; 43.294,30.055 44.283,29.067 ; 43.294,32.755 44.283,33.744 ; 43.294,45.056 44.283,44.067 ; 43.294,47.756 44.283,48.744 ; 43.294,60.056 44.283,59.067 ; 43.294,62.756 44.283,63.744 ; 44.283,14.067 45.633,13.705 ; 44.283,18.744 45.633,19.105 ; 44.283,29.067 45.633,28.706 ; 44.283,33.744 45.633,34.105 ; 44.283,44.067 45.633,43.706 ; 44.283,48.744 45.633,49.105 ; 44.283,59.067 45.633,58.706 ; 44.283,63.744 45.633,64.106 ; 44.338,11.576 46.926,11.576 ; 44.338,21.235 46.926,21.235 ; 44.338,26.576 46.926,26.576 ; 44.338,36.235 46.926,36.235 ; 44.338,41.576 46.926,41.576 ; 44.338,51.235 46.926,51.235 ; 44.338,56.576 46.926,56.576 ; 44.338,66.235 46.926,66.235 ; 45.633,13.705 46.983,14.067 ; 45.633,19.105 46.983,18.744 ; 45.633,28.706 46.983,29.067 ; 45.633,34.105 46.983,33.744 ; 45.633,43.706 46.983,44.067 ; 45.633,49.105 46.983,48.744 ; 45.633,58.706 46.983,59.067 ; 45.633,64.106 46.983,63.744 ; 46.926,11.576 49.168,12.87 ; 46.926,21.235 49.168,19.941 ; 46.926,26.576 49.168,27.87 ; 46.926,36.235 49.168,34.941 ; 46.926,41.576 49.168,42.87 ; 46.926,51.235 49.168,49.941 ; 46.926,56.576 49.168,57.87 ; 46.926,66.235 49.168,64.941 ; 46.983,14.067 47.971,15.055 ; 46.983,18.744 47.971,17.755 ; 46.983,29.067 47.971,30.055 ; 46.983,33.744 47.971,32.755 ; 46.983,44.067 47.971,45.056 ; 46.983,48.744 47.971,47.756 ; 46.983,59.067 47.971,60.056 ; 46.983,63.744 47.971,62.756 ; 47.971,15.055 48.332,16.405 ; 47.971,17.755 48.332,16.405 ; 47.971,30.055 48.332,31.405 ; 47.971,32.755 48.332,31.405 ; 47.971,45.056 48.332,46.406 ; 47.971,47.756 48.332,46.406 ; 47.971,60.056 48.332,61.406 ; 47.971,62.756 48.332,61.406 ; 49.168,12.87 50.462,15.111 ; 49.168,19.941 50.462,17.7 ; 49.168,27.87 50.462,30.112 ; 49.168,34.941 50.462,32.7 ; 49.168,42.87 50.462,45.112 ; 49.168,49.941 50.462,47.7 ; 49.168,57.87 50.462,60.112 ; 49.168,64.941 50.462,62.7 ; 50.462,15.111 50.462,17.7 ; 50.462,30.112 50.462,32.7 ; 50.462,45.112 50.462,47.7 ; 50.462,60.112 50.462,62.7

## Polygon pours and split planes (outlines as drawn)
GND on Bottom Layer "GND_L02_P003" (solid, pour order 3): 0,0 53.25,0 53.25,75 0,75
GND on Top Layer "GND_L01_P002" (solid, pour order 2): 0,0 53.25,0 53.25,75 0,75

## Silkscreen, mask and mechanical layers (free items; w line width, h text height)
Top Overlay:
  text "Moduloop V1" at 35.1,5.3 h1
  text "SDP Team 28: Ryan Gordon  Conor Curtin Evan Rovelli  Shawn Colby" at 33.4,1.2 h0.6
Bottom Overlay:
  circle w0.25: c3.8,4.415 r0.125
  lines w0.2: 1.765,-12.205 21.675,-12.205 21.675,-0.365 1.765,-0.365 1.765,-12.205
Top Solder:
  circle w3: c45.625,16.41 r3.8
  circle w3: c30.635,16.405 r3.8
  circle w3: c15.625,16.41 r3.8
  circle w3: c15.635,31.4 r3.8
  circle w3: c30.63,31.405 r3.8
  circle w3: c45.63,31.425 r3.8
  circle w3: c45.63,46.4 r3.8
  circle w3: c15.63,46.41 r3.8
  circle w3: c30.63,46.405 r3.8
  circle w3: c45.65,61.41 r3.8
  circle w3: c15.63,61.4 r3.8
  circle w3: c30.64,61.425 r3.8
Bottom Assembly:
  lines w0.2: 1.665,-16.33 21.775,-16.33 21.775,3.6 1.665,3.6 1.665,-16.33
  text ".Designator" at 11.72,-6.553 h1 r180
Bottom 3D Body:
  lines w0.2: 1.765,-12.205 21.675,-12.205 21.675,-0.365 1.765,-0.365 1.765,-12.205
Mechanical 20:
  lines w0.127: 2.47,16.99 2.47,31.99 ; 2.47,16.99 2.47,1.99 17.47,1.99 ; 2.47,16.99 17.47,16.99 ; 2.47,31.99 2.47,46.99 ; 2.47,31.99 17.47,31.99 ; 2.47,46.99 2.47,61.99 17.47,61.99 ; 2.47,46.99 17.47,46.99 ; 17.47,1.99 32.47,1.99 ; 17.47,1.99 17.47,16.99 ; 17.47,16.99 17.47,31.99 ; 17.47,16.99 32.47,16.99 ; 17.47,31.99 17.47,46.99 ; 17.47,31.99 32.47,31.99 ; 17.47,46.99 17.47,61.99 ; 17.47,46.99 32.47,46.99 ; 17.47,61.99 32.47,61.99 ; 32.47,1.99 47.47,1.99 ; 32.47,1.99 32.47,16.99 ; 32.47,16.99 32.47,31.99 ; 32.47,16.99 47.47,16.99 ; 32.47,31.99 32.47,46.99 ; 32.47,31.99 47.47,31.99 ; 32.47,46.99 32.47,61.99 ; 32.47,46.99 47.47,46.99 ; 32.47,61.99 47.47,61.99 ; 47.47,1.99 62.47,1.99 62.47,16.99 ; 47.47,1.99 47.47,16.99 ; 47.47,16.99 62.47,16.99 ; 47.47,16.99 47.47,31.99 ; 47.47,31.99 47.47,46.99 ; 47.47,31.99 62.47,31.99 ; 47.47,46.99 47.47,61.99 ; 47.47,46.99 62.47,46.99 ; 47.47,61.99 62.47,61.99 62.47,46.99 ; 62.47,16.99 62.47,31.99 ; 62.47,31.99 62.47,46.99
Bottom Courtyard:
  lines w0.2: 1.665,-16.33 21.775,-16.33 21.775,3.6 1.665,3.6 1.665,-16.33
Bottom Component Center:
  lines w0.1: 11.22,-6.285 12.22,-6.285 ; 11.72,-6.785 11.72,-5.785